# Altium PCB SourceFollower_FET_SOT23.PcbDoc
Units mm, origin at the board's own origin, x right, y up, seen from the top; angles counter-clockwise.
Board outline 60.07 x 8 mm, 2 copper layers (Top Layer, Bottom Layer); 21 components, 9 nets, 43 pads, 6 vias.
Unrouted connection lines stored in the file: 30.
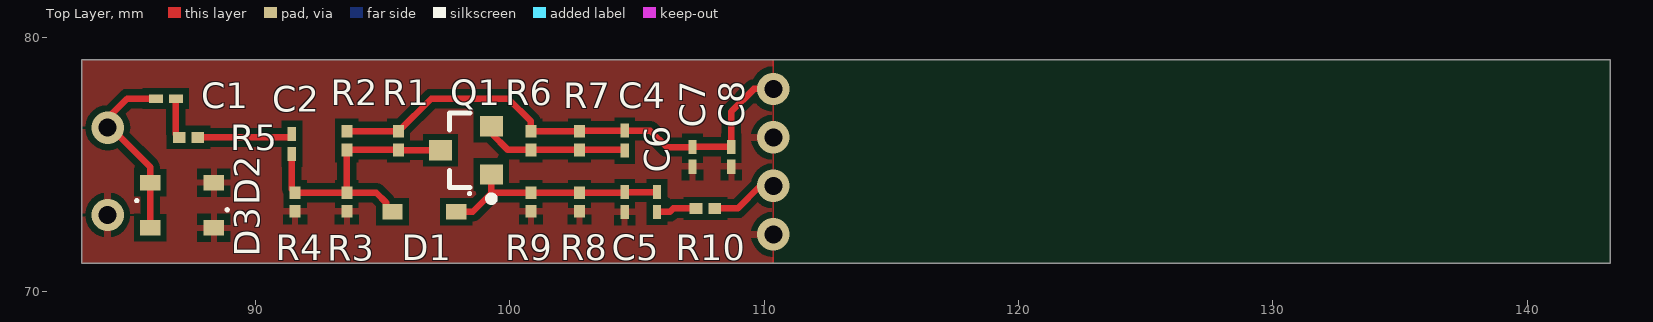
[diagram p0: Top Layer view]
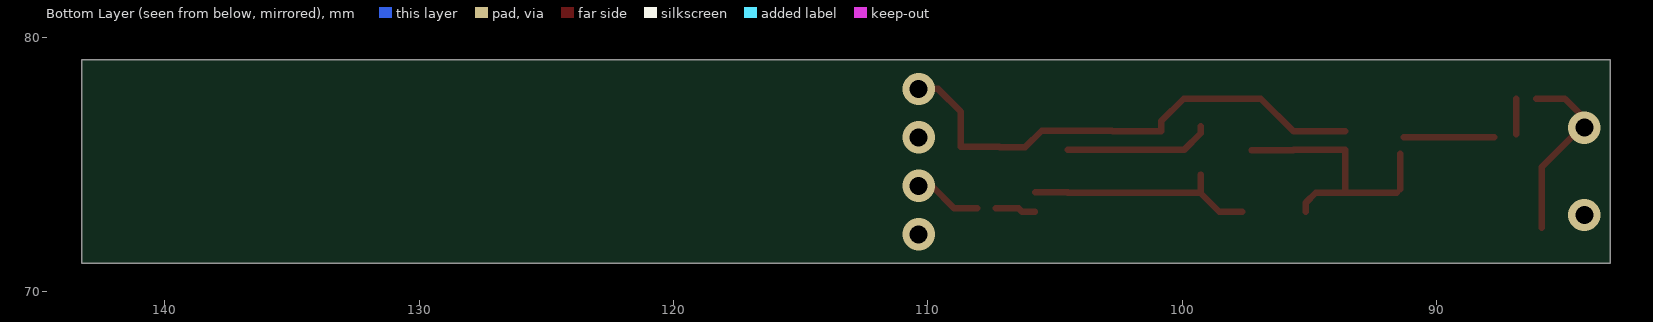
[diagram p1: Bottom Layer view, seen from below]

## Layer stack, top to bottom
Top Solder: solder mask 0.0102, Solder Resist, Dk 3.5
Top Layer: signal copper 0.0356
Dielectric 1: dielectric 0.32, FR-4, Dk 4.8
Bottom Layer: signal copper 0.0356
Bottom Solder: solder mask 0.0102, Solder Resist, Dk 3.5

## Board outline
83.185,71.12 143.256,71.12 143.256,79.121 83.185,79.121

## Design rules (kind name [scope] priority, off if disabled: settings)
Clearance [All] p1: gap=0.254 ignorepadtopadclearanceinfootprint=FALSE except(0: Arc-Hole Track-Hole SMDPad-Hole THPad-Hole Via-Hole Fill-Hole Poly-Hole Region-Hole Text-Hole)
PolygonConnect [All] p1: connectstyle=Relief reliefconductorwidth=0.254 reliefentries=4 polygonreliefangle="90 Angle" airgapwidth=0.254
RoomDefinition SourceFollower_FET_SOT23 [InComponentClass('SourceFollower_FET_SOT23')] p1: confinementstyle=ConfineIn formatcopy=TRUE lockcomponents=FALSE outline 59.451,65.659 62.992,65.659 62.992,67.056 59.451,67.056
RoutingVias [All] p1: holewidth=0.711 width=1.27 viastyle="Through Hole" minholewidth=0.711 minwidth=1.27 maxholewidth=0.711 maxwidth=1.27
SolderMaskExpansion [All] p1: expansion=0.102
Width [All] p1: maxlimit=0.254 minlimit=0.254 preferedwidth=0.254
30 further rules are at their usual default settings.

## Components (designator, comment, footprint, x,y, rotation, side; value= is the part's Value field where it differs from the comment)
C1 "Part Number: C0201C270J3GACTU" C0201 86.487,77.597 r0 top value=Value
C2 "Part Number: C0201C270J3GACTU" C0201 91.44,75.819 r90 top value=Value
C4 "Part Number: C0201C270J3GACTU" C0201 104.521,75.946 r90 top value=Value
C5 "Part Number: C0201C270J3GACTU" C0201 104.521,73.533 r90 top value=Value
C6 "Part Number: C0201C270J3GACTU" C0201 105.791,73.533 r90 top value=Value
C7 "Part Number: C0201C270J3GACTU" C0201 107.188,75.311 r90 top value=Value
C8 "Part Number: C0201C270J3GACTU" C0201 108.712,75.311 r90 top value=Value
D1 "BAT15-03W" INF-SOD323_V 96.647,73.152 r270 top
D2 "BAT15-03W" INF-SOD323_V 87.122,74.295 r90 top
D3 "BAT15-03W" INF-SOD323_V 87.122,72.517 r270 top
Q1 "MMBFJ309LT1" ONSC-SOT-23-3-318-08_V 98.282,75.565 r180 top
R1 "Part Number: RC0201FR-0718KL" RES_RC0201_P6XP3 95.631,75.946 r90 top value=Value
R2 "Part Number: RC0201FR-0718KL" RES_RC0201_P6XP3 93.599,75.946 r90 top value=Value
R3 "Part Number: RC0201FR-0718KL" RES_RC0201_P6XP3 93.599,73.533 r90 top value=Value
R4 "Part Number: RC0201FR-0718KL" RES_RC0201_P6XP3 91.567,73.533 r90 top value=Value
R5 "Part Number: RC0201FR-0718KL" RES_RC0201_P6XP3 87.376,76.073 r180 top value=Value
R6 "Part Number: RC0201FR-0718KL" RES_RC0201_P6XP3 100.838,75.946 r90 top value=Value
R7 "Part Number: RC0201FR-0718KL" RES_RC0201_P6XP3 102.743,75.946 r90 top value=Value
R8 "Part Number: RC0201FR-0718KL" RES_RC0201_P6XP3 102.743,73.533 r90 top value=Value
R9 "Part Number: RC0201FR-0718KL" RES_RC0201_P6XP3 100.838,73.533 r270 top value=Value
R10 "Part Number: RC0201FR-0718KL" RES_RC0201_P6XP3 107.696,73.279 r0 top value=Value

## Footprints (in the part's own frame and the unit in brackets; to place one, negate y for a bottom-side part, rotate by r counter-clockwise, add the part's x,y. Pads: shape width x height; smd on the part's side, far side on the other; paste and mask are expansions set on the pad)
C0201 [mil]
  rect 21.78x13 smd paste+0 mask+0: 1(-15.39,0) 2(15.39,0)
  body extent 0,0 10,10, height 10
INF-SOD323_V [mm] "SOD, 2-Leads, Body 1.7x1.25 mm"
  rect 0.6x0.8 smd: 1(0,1.25) 2(0,-1.25)
  silkscreen extent -0.76,1.73 -0.66,1.83, body extent -0.63,-0.85 0.63,0.85, height 1.1
ONSC-SOT-23-3-318-08_V [mm] "SOT23, 3-Leads, Body 2.92x1.3mm, Pitch 0.95mm"
  rect 0.9x0.8 smd: 1(-1,0.95) 2(-1,-0.95) 3(1,0)
  silkscreen extent -1.13,-1.46 0.65,2.02, body extent -0.65,-1.46 0.65,1.46, height 1.11
RES_RC0201_P6XP3 [mm]
  rect 0.503x0.43 smd paste+0 mask+0: 1(-0.366,0) 2(0.366,0)
  body extent 0,0 0.25,0.25, height 0.25

## Part data
C1 C2 C4 C5 C6 C7 C8: library part C0201C270J3GACTU, "No Description Available", Built_By=EMA_UL_Team, Copyright="Copyright (C) 2018 Accelerated Designs. All rights reserved", Manufacturer_Part_Number=C0201C270J3GACTU, RefDes=RefDes, Type=DEV, Vendor=Kemet
D1 D2 D3: "Single Silicon Schottky Diode, 110 mA IF Max, SOD32, Green", Manufacturer=Infineon, Supplier Part Number 1=N/A, ComponentLink1Description="Manufacturer URL", ComponentLink1URL=http://www.infineon.com/, ComponentLink2Description=Datasheet, ComponentLink2URL=http://www.infineon.com/dgdl/bat15series.pdf?folderId=db3a304314dca3890114ff6812070b44&fileId=db3a304314dca3890114ff6b74ca0b48&location=en.Products.RF.RF_Mixer___Detector_Schottky_Diodes.DATASHEET.bat15series.pdf, ComponentLink3Description="Package Specification", ComponentLink3URL=http://www.infineon.com/dgdl/SOD323-Package_Overview.pdf?folderId=db3a30431936bc4b011952aab84f3bbe&fileId=db3a30431936bc4b011952beed653be3, Configuration=Single, CT (typ)="0.26 pF", DatasheetVersion=Jun-2011, Green=yes, Group="RF Mixer", IF (max)="110 mA", Mounting Technology="Surface Mount", PackageDescription="2-Pin Small Outline Diode Package, 1.25 x 1.7 mm Body", PackageReference=SOD323, PartNumber=BAT15-03W, Supplier 1=Mouser, VF (typ)="0.23 V", VR (max)="4 V"
Q1: "JFET - VHF / UHF Amplifier Transistor, N-Channel, 3-Pin SOT-23, Tape and Reel", Manufacturer="On Semiconductor", Supplier Part Number 1=MMBFJ309LT1OSCT-ND, Channel Polarity="N Channel", Ciss Max (pF)=5, ComponentLink1Description="Manufacturer URL", ComponentLink1URL=http://www.onsemi.com/, ComponentLink2Description=Datasheet, ComponentLink2URL=http://www.onsemi.cn/pub_link/Collateral/MMBFJ309LT1-D.PDF, ComponentLink3Description="Package Specification", ComponentLink3URL=http://www.onsemi.cn/pub_link/Collateral/318-08.PDF, Crss Max (pF)=2.5, DatasheetVersion="Rev. 7", IDSS Max (uA)=30000, IDSS Min (uA)=12000, Mounting Technology="Surface Mount", PackageDescription="3-Pin Small Outline Transistor, Body 2.92 x 1.3 mm, Pitch 0.95 mm", PackageReference=SOT-23-3-318-08, PackageVersion="Rev. AP, 11/2009", Packing="Tape and Reel", PartNumber=MMBFJ309LT1, Supplier 1=Digi-Key, V(BR)GSS Min (V)=25
R1 R2 R3 R4 R5 R6 R7 R8 R9 R10: library part RC0201FR-0718KL, "No Description Available", Built_By=EMA_Anthony, Copyright="Copyright (C) 2018 Accelerated Designs. All rights reserved", Manufacturer_Part_Number=RC0201FR-0718KL, RefDes=RefDes, Type=DEV, Vendor=Yageo

## Via types
v1: diameter 1.27, hole 0.711, Top Layer to Bottom Layer, 6 vias

## Nets (pads, with @x,y where several pads share a name; then routed paths per layer and width w, separated by ;. In a path a pad name is that pad's centre, name@x,y a point inside that pad or via, vN(x,y) a via of type N, cw(c..) or ccw(c..) an arc to the next point about the centre after c; other vN are vias at no path point)
GND: C2.1 C5.1 C7.1 C8.1 D2.2 D3.1 R3.1 R4.1 R8.1 R9.2
  other v1: 110.363,72.263 84.201,73.025 110.363,76.073
NetC1_2: C1.2 R5.2
NetC2_2: C2.2 D1.2 Q1.3 R1.1 R2.1 R3.2 R4.2 R5.1
NetC4_1: C4.1 Q1.2 R6.1 R7.1
NetC5_2: C5.2 C6.2 D1.1 Q1.1 R8.2 R9.1
NetC6_1: C6.1 R10.1
"RF In": C1.1 D2.1 D3.2
  other v1: 84.201,76.454
"RF Out": R10.2
  other v1: 110.363,74.168
VCC: C4.2 C7.2 C8.2 R1.2 R2.2 R6.2 R7.2
  other v1: 110.363,77.978
copper on no net: | length 62
  Top Layer w0.254: 84.201,76.454 84.328,76.454 85.872,74.91 85.872,74.295 85.872,72.517 ; 84.328,76.962 84.963,77.597 86.096,77.597 ; 86.878,76.205 86.878,77.597 ; 87.742,76.073 91.303,76.073 ; 91.44,74.026 91.44,75.428 ; 91.567,73.899 93.599,73.899 ; 93.599,76.312 95.631,76.312 96.916,77.597 99.949,77.597 100.838,76.708 100.838,76.312 102.743,76.312 ; 95.143,73.152 95.143,73.513 94.757,73.899 93.599,73.899 ; 97.282,75.565 95.646,75.565 95.631,75.58 93.599,75.58 93.599,73.899 ; 97.643,73.152 98.552,73.152 99.282,73.882 ; 99.282,74.615 99.282,73.882 ; 99.282,76.515 99.282,76.232 99.934,75.58 100.838,75.58 102.743,75.58 104.496,75.58 ; 102.768,76.337 104.521,76.337 105.527,76.337 106.172,75.692 107.178,75.692 107.188,75.702 108.712,75.702 ; 104.509,73.911 105.779,73.911 ; 104.521,73.924 104.496,73.899 102.743,73.899 100.838,73.899 99.299,73.899 99.282,73.882 ; 105.791,73.142 106.289,73.142 106.426,73.279 107.33,73.279 ; 108.062,73.279 108.966,73.279 109.855,74.168 ; 108.712,76.073 108.712,75.702 ; 109.855,77.978 109.601,77.978 108.712,77.089 108.712,76.962 108.712,75.702 ; 110.109,74.168 109.855,74.168 ; 110.363,74.168 109.855,74.168

## Polygon pours and split planes (outlines as drawn)
GND on Top Layer (solid, pour order 20): 110.363,79.121 110.363,71.12 83.185,71.12 83.185,79.121
no net on Top Layer (solid, pour order 18): 110.363,71.12 110.363,79.121
no net on Top Layer "Top Layer-No Net 2" (solid, pour order 14): 112.903,71.12
no net on Top Layer "Top Layer-No Net 3" (solid, pour order 8): 83.185,79.248
no net on Top Layer "Top Layer-No Net" (solid, pour order 2): 113.411,78.867